# EAGLE board eggfckr (EAGLE 7.2.0)
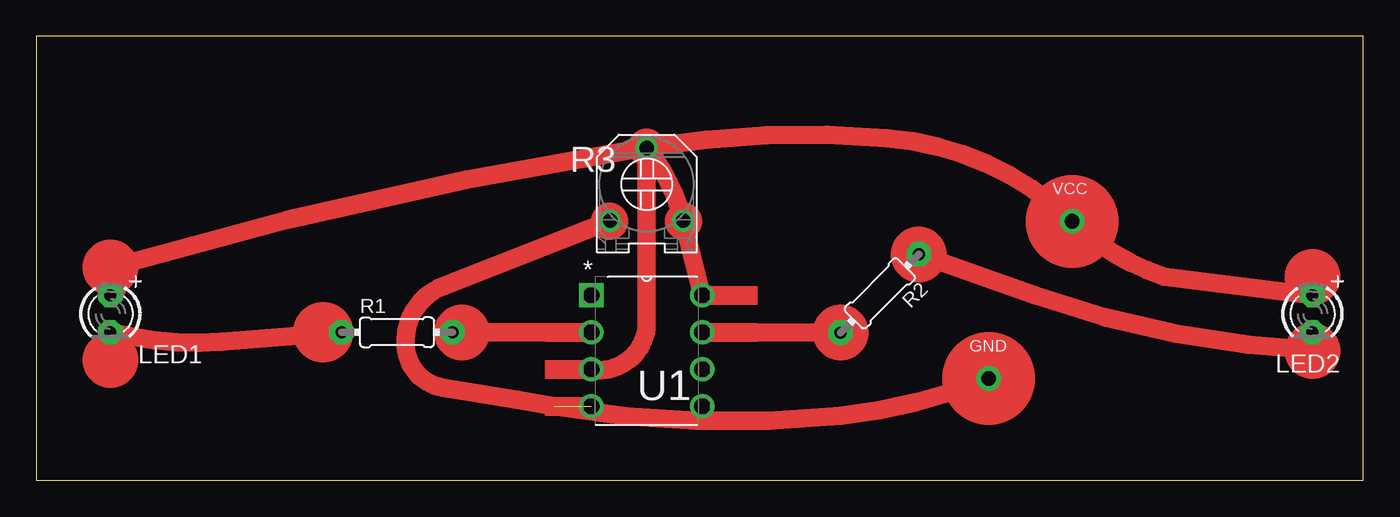
[diagram p0: board, top side]

Size 91.11 x 30.47 mm. Coordinates in mm from the lower left corner, seen from the top.
Outline: 0,0 91.11,0 91.11,30.47 0,30.47 0,0
Copper layers (1*16): Top 0.035mm / dielectric 1.5mm / Bottom 0.035mm
Design rules "default": minimum track width 10mil, minimum drill 0.6mm, track to track 8mil, track to pad 8mil, pad to pad 8mil, via to via 8mil, smd to smd 8mil, copper to edge 40mil, drill to drill 8mil, minimum pad ring 10mil, minimum via ring 8mil, stop-mask expansion 4mil, vias tented up to drill 0mil, thermal gap 10mil

## Footprints (pad centres in the part's own frame; a part is rotated, then mirrored left to right if it is on the bottom)
1X01_ROUND = drill 1 pad 1.676: 1 0,0
LED3MM = drill 0.813 pad 1.676 octagon: A -1.27,0; K 1.27,0
0204/7 = drill 0.813 pad 1.676 octagon: 1 -3.81,0; 2 3.81,0
TRIMMER_3306F = drill 1: 1 -2.5,-2.5; 2 0,2.5; 3 2.5,-2.5
DIP254P762X533-8 = drill 1.118 square: 1 -7.62,7.62 | drill 1.118: 2 -7.62,5.08; 3 -7.62,2.54; 4 -7.62,0; 5 0,0; 6 0,2.54; 7 0,5.08; 8 0,7.62

## Placement (x,y rotation side)
GND  [1X01_ROUND]  65.41,6.99 0 top
LED1  [LED3MM]  5.08,11.43 270 top
LED2  [LED3MM]  87.63,11.43 270 top
R1  [0204/7]  24.77,10.16 0 top
R2  [0204/7]  57.91,12.83 225 top
R3  [TRIMMER_3306F]  41.91,20.32 0 top
U1  ATTINY85-20PU  [DIP254P762X533-8]  45.72,5.08 0 top
VCC  [1X01_ROUND]  71.12,17.78 0 top

## Library data of the parts
GND VCC = microbuilder
LED1 LED2 R1 R2 = adafruit
R3 = dp_devices
U1 = Atmel_By_element14_Batch_1-00; MPN: ATTINY85-20PU; OC_FARNELL: 1455162; OC_NEWARK: 58M3796; PACKAGE: PDIP-8; SUPPLIER: Atmel

## Nets
GND: GND.1 R3.1 U1.4
N$1: R2.2 U1.7
N$2: R3.2 U1.3
N$4: R1.2 U1.2
N$6: LED1.K R1.1
N$7: LED2.K R2.1
VCC: LED1.A LED2.A R3.3 U1.8 VCC.1

## Tracks (layer width: path | path; a pad name or v marks a point on that pad's centre or on a via)
GND  (1 unrouted)
  Top 1.27: R3.1 27.94,13.34 arc78 25.4,8.89 arc72 27.94,6.35 arc-1 35.56,5.08 arc16 55.24,4.45 arc16 GND.1
N$1
  Top 1.27: R2.2 U1.7
N$2
  Top 1.27: R3.2 41.91,10.79 arc-100 U1.3
N$4
  Top 1.27: U1.2 R1.2
N$6
  Top 1.27: R1.1 12.7,9.53 arc-18 LED1.K
N$7
  Top 1.27: R2.1 68.58,12.7 arc17 88.27,8.89 87.63,8.89 LED2.K
VCC
  Top 1.27: U1.8 44.58,17.18 R3.3 arc24 41.91,22.86 | LED2.A 77.47,13.97 arc-26 VCC.1 arc39 58.42,23.5 arc14 41.91,22.86 | 41.91,22.86 arc7 5.08,14.61 arc148 5.08,13.97 arc-148 LED1.A
(copper drawn outside any net)
  shapes: Top area x5, Top circle x26